# EAGLE board Keyboard_Scanner_LT_0p5 (EAGLE 9.5.0)
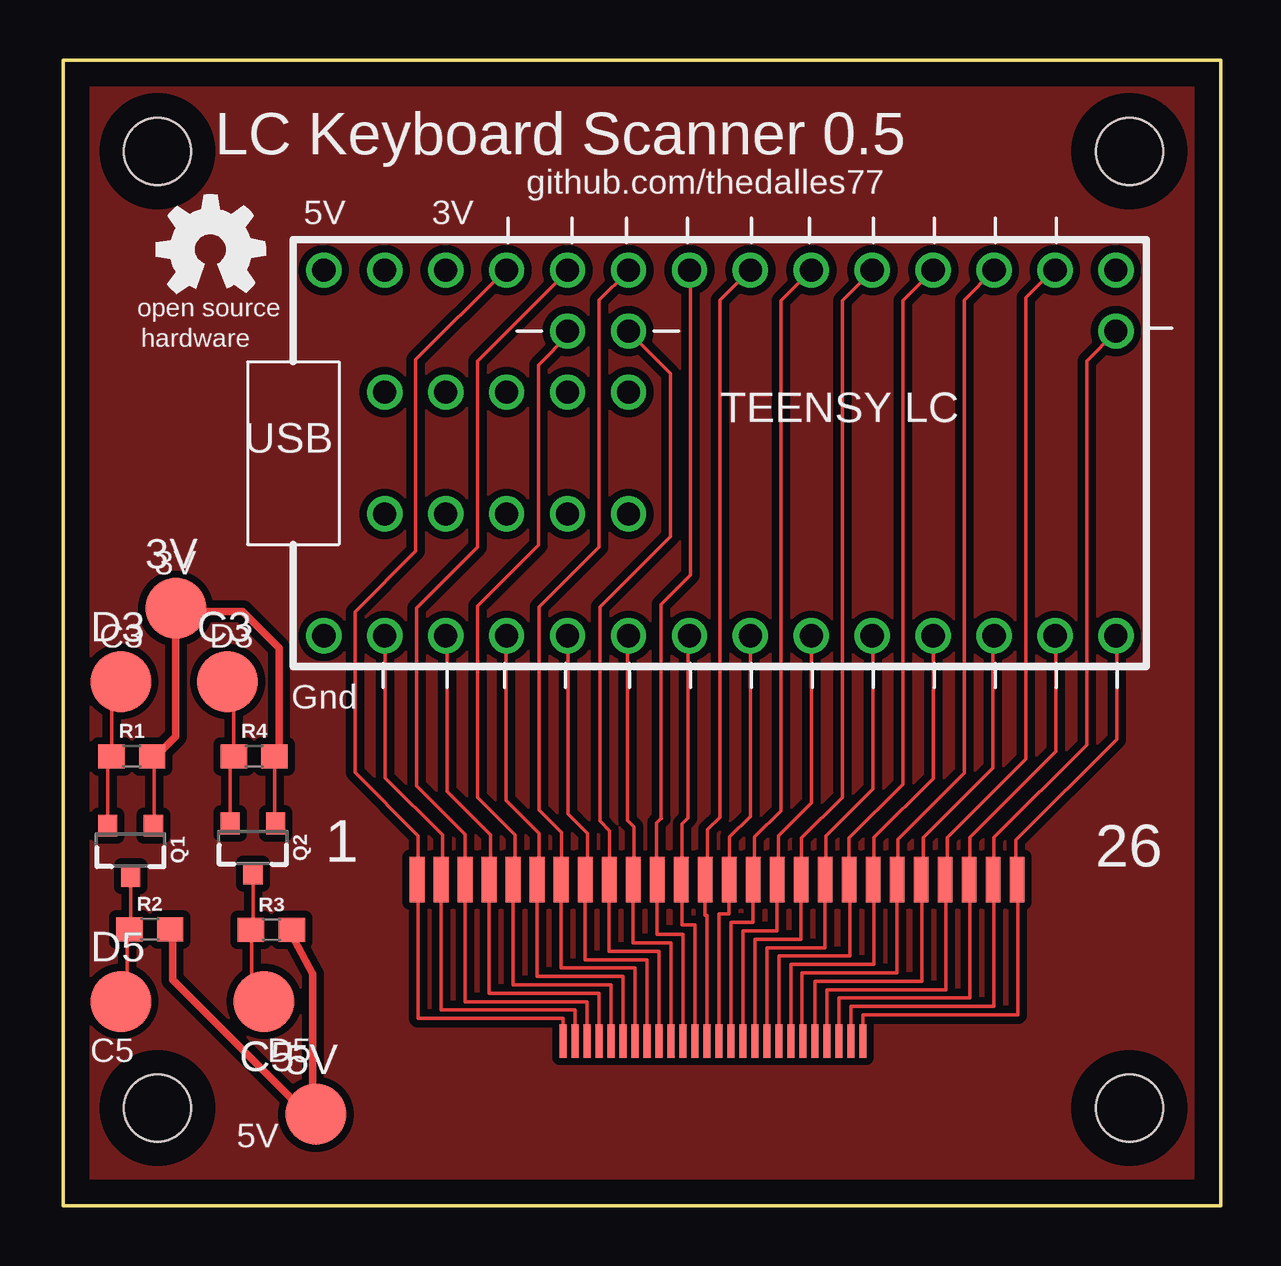
[diagram p0: board, top side]
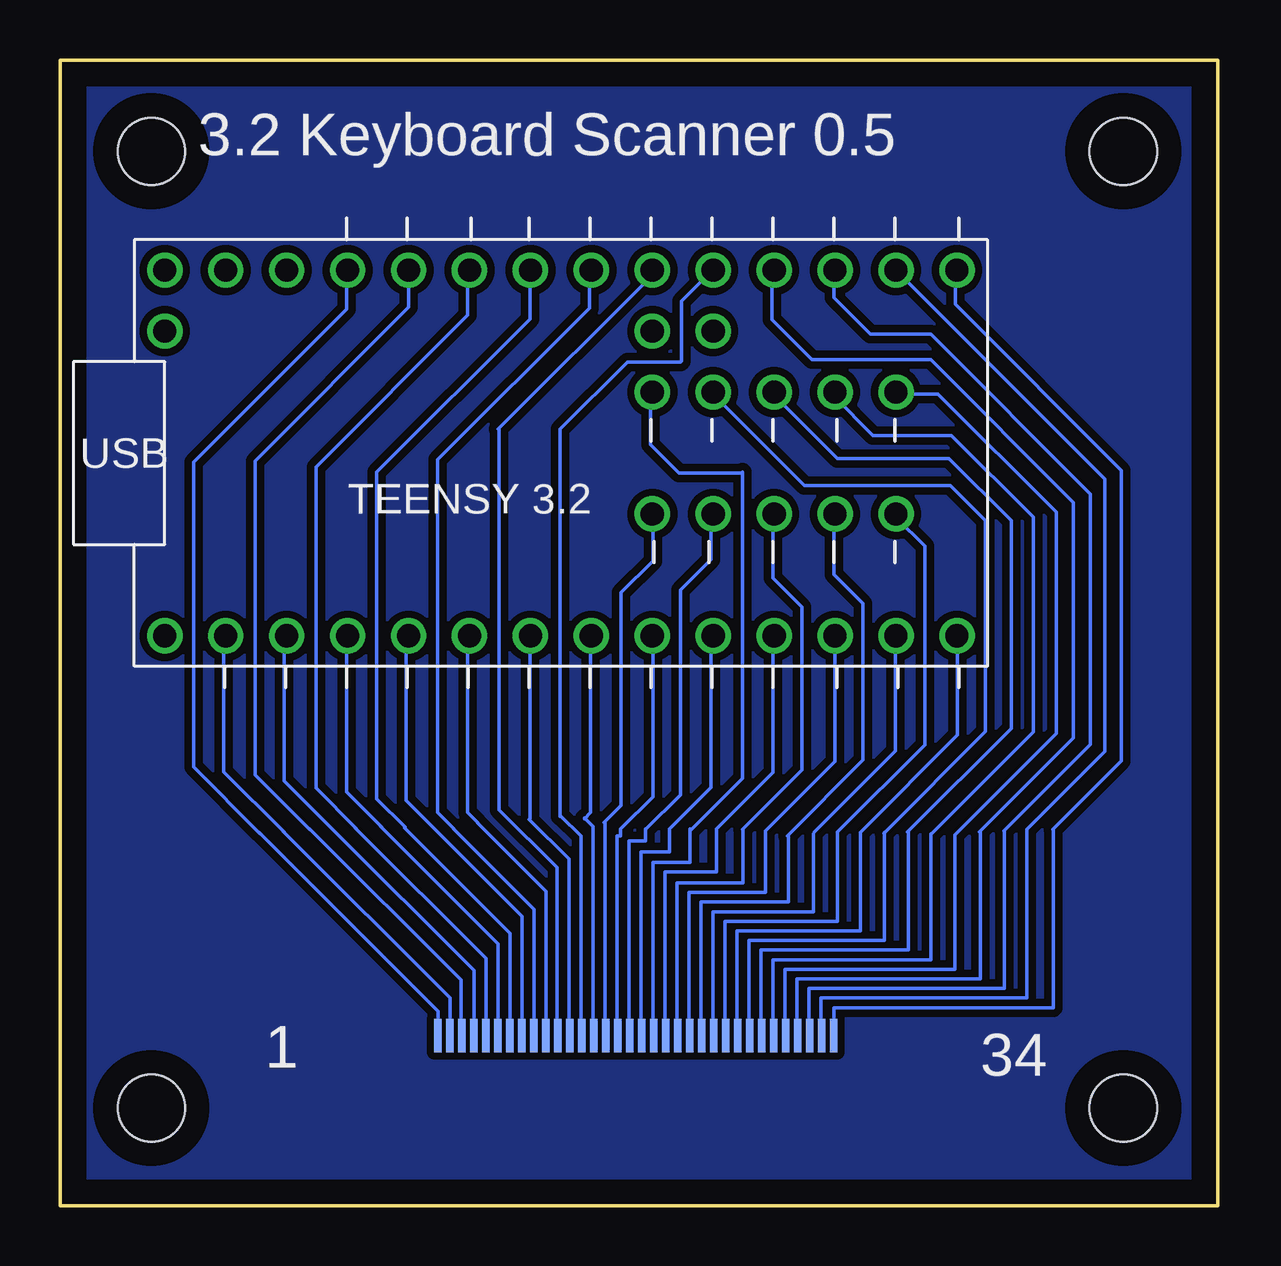
[diagram p1: board, bottom side, seen from below]

Size 48.26 x 47.75 mm. Coordinates in mm from the lower left corner, seen from the top.
Outline: 0,0 0,47.75 48.26,47.75 48.26,0 0,0
Copper layers (1*16): Top 0.035mm / dielectric 1.5mm / Bottom 0.035mm
Design rules "default": minimum track width 6mil, minimum drill 0.35mm, track to track 6mil, track to pad 6mil, pad to pad 6mil, via to via 6mil, smd to smd 6mil, copper to edge 40mil, drill to drill 6mil, minimum pad ring 10mil, minimum via ring 8mil, stop-mask expansion 4mil, vias tented up to drill 0mil, thermal gap 10mil
Holes 2.8 mm at 44.45,4.06 44.45,43.94 3.94,43.94 3.94,4.06

## Footprints (pad centres in the part's own frame; a part is rotated, then mirrored left to right if it is on the bottom)
B2,54 = smd 2.54 x 2.54: TP 0,0
TEENSY_COMBO = drill 0.965: 1 -11.43,7.62; 2 -13.97,7.62; 3 -16.51,7.62; 4 -6.35,5.08; 5 -3.81,5.08; 6 -3.81,2.54; 7 -6.35,2.54; 8 -8.89,2.54; 9 -11.43,2.54; 10 -13.97,2.54; 11 -13.97,-2.54; 12 -11.43,-2.54; 13 -8.89,-2.54; 14 -6.35,-2.54; 15 -3.81,-2.54; A -16.51,-7.62; B -13.97,-7.62; C -11.43,-7.62; D -8.89,-7.62; E -6.35,-7.62; F -3.81,-7.62; G -1.27,-7.62; H 1.27,-7.62; I 3.81,-7.62; J 6.35,-7.62; K 8.89,-7.62; L 11.43,-7.62; M 13.97,-7.62; N 16.51,-7.62; O 16.51,5.08; P 16.51,7.62; Q 13.97,7.62; R 11.43,7.62; S 8.89,7.62; T 6.35,7.62; U 3.81,7.62; V 1.27,7.62; W -1.27,7.62; X -3.81,7.62; Y -6.35,7.62; Z -8.89,7.62
FPC_DUAL = smd 0.61 x 1.905: 1 11.836,3.429; 2 10.836,3.429; 3 9.835,3.429; 4 8.834,3.429; 5 7.833,3.429; 6 6.833,3.429; 7 5.832,3.429; 8 4.831,3.429; 9 3.83,3.429; 10 2.83,3.429; 11 1.829,3.429; 12 0.828,3.429; 13 -0.173,3.429; 14 -1.173,3.429; 15 -2.174,3.429; 16 -3.175,3.429; 17 -4.176,3.429; 18 -5.177,3.429; 19 -6.177,3.429; 20 -7.178,3.429; 21 -8.179,3.429; 22 -9.18,3.429; 23 -10.18,3.429; 24 -11.181,3.429; 25 -12.182,3.429; 26 -13.183,3.429 | smd 0.3 x 1.4: P$1 5.4,-3.3; P$2 4.9,-3.3; P$3 4.4,-3.3; P$4 3.9,-3.3; P$5 3.4,-3.3; P$6 2.9,-3.3; P$7 2.4,-3.3; P$8 1.9,-3.3; P$9 1.4,-3.3; P$10 0.9,-3.3; P$11 0.4,-3.3; P$12 -0.1,-3.3; P$13 -0.6,-3.3; P$14 -1.1,-3.3; P$15 -1.6,-3.3; P$16 -2.1,-3.3; P$17 -2.6,-3.3; P$18 -3.1,-3.3; P$19 -3.6,-3.3; P$20 -4.1,-3.3; P$21 -4.6,-3.3; P$22 -5.1,-3.3; P$23 -5.6,-3.3; P$24 -6.1,-3.3; P$25 -6.6,-3.3; P$26 -7.1,-3.3
FPC_DUAL_FRONT = smd 0.3 x 1.4 bottom: P$1 8.76,0.39; P$2 8.26,0.39; P$3 7.76,0.39; P$4 7.26,0.39; P$5 6.76,0.39; P$6 6.26,0.39; P$7 5.76,0.39; P$8 5.26,0.39; P$9 4.76,0.39; P$10 4.26,0.39; P$11 3.76,0.39; P$12 3.26,0.39; P$13 2.76,0.39; P$14 2.26,0.39; P$15 1.76,0.39; P$16 1.26,0.39; P$17 0.76,0.39; P$18 0.26,0.39; P$19 -0.24,0.39; P$20 -0.74,0.39; P$21 -1.24,0.39; P$22 -1.74,0.39; P$23 -2.24,0.39; P$24 -2.74,0.39; P$25 -3.24,0.39; P$26 -3.74,0.39; P$27 -4.24,0.39; P$28 -4.74,0.39; P$29 -5.24,0.39; P$30 -5.74,0.39; P$31 -6.24,0.39; P$32 -6.74,0.39; P$33 -7.24,0.39; P$34 -7.74,0.39
SOT23-3 = smd 0.8 x 0.9: 1 -0.95,-1; 2 0.95,-1; 3 0,1.1
0603 = smd 1.1 x 1: 1 -0.85,0; 2 0.85,0

## Placement (x,y rotation side)
3V  [B2,54]  4.7,24.89 0 top  (not fitted)
5V  [B2,54]  10.54,3.81 0 top  (not fitted)
C3  [B2,54]  6.86,21.84 0 top  (not fitted)
C5  [B2,54]  8.38,8.51 180 top  (not fitted)
D3  [B2,54]  2.41,21.84 0 top  (not fitted)
D5  [B2,54]  2.41,8.51 0 top  (not fitted)
E$1  [TEENSY_COMBO]  27.38,31.37 0 top
E$2  [FPC_DUAL]  27.94,10.16 0 top
E$3  [FPC_DUAL_FRONT]  23.75,6.7 0 top
E$4  [OSHW_5MM]  6.15,39.85 0 top
Q1  220mA/50V/3.5Ω  [SOT23-3]  2.82,14.83 180 top
Q2  220mA/50V/3.5Ω  [SOT23-3]  7.92,14.93 180 top
R1  10k  [0603]  2.87,18.73 0 top
R2  10k  [0603]  3.62,11.52 0 top
R3  10k  [0603]  8.69,11.49 0 top
R4  10k  [0603]  7.97,18.73 0 top

## Library data of the parts
3V 5V C3 C5 D3 D5 = testpad
E$1 = Teensy_Combo
E$2 = FPC_Dual_front_0p5
E$3 = FPC_single_back_0p5
E$4 = oshw
Q1 Q2 = SparkFun-DiscreteSemi; PROD_ID: TRANS-00830
R1-R4 = SparkFun-Resistors; PROD_ID: RES-00824

## Nets
3V: R4.2
5V: R2.2
CLK: Q1.2 R1.1
DATA: Q2.2 R4.1
S$33: E$1.R
S$127: R3.2
TP_CLK: Q1.3 R2.1
TP_DATA: Q2.3 R3.1

## Tracks (layer width: path | path; a pad name or v marks a point on that pad's centre or on a via)
3V
  Top 0.152: 8.82,18.47 8.82,15.67
5V
  Top 0.813: 4.52,11.47 R2.2
CLK
  Top 0.152: Q1.2 1.87,18.63 2.03,18.98 2.03,20.7
CLK1
  Top 0.152: 2.67,9.2 2.67,11.56
CLK2
  Top 0.152: 7.86,8.82 7.86,11.18
DATA
  Top 0.152: Q2.2 6.97,18.63 R4.1 7.12,21.08
S$1
  Top 0.152: 39.8,12.7 39.8,7.95 33.35,7.95 33.35,7.45
S$2
  Top 0.152: 38.8,12.75 38.8,8.3 32.85,8.3 32.85,7.5
S$3
  Top 0.152: 37.8,12.7 37.8,8.65 32.35,8.65 32.35,7.45
S$4
  Top 0.152: 36.8,12.7 36.8,9 31.85,9 31.85,7.5
S$5
  Top 0.152: 35.8,12.7 35.8,9.35 31.35,9.35 31.35,7.5
S$6
  Top 0.152: 34.75,12.7 34.75,9.7 30.8,9.7 30.8,7.45
S$7
  Top 0.152: 33.8,12.7 33.8,10.05 30.35,10.05 30.35,7.5
S$8
  Top 0.152: 32.8,12.7 32.8,10.4 29.85,10.4 29.85,7.5
S$9
  Top 0.152: 31.75,12.7 31.75,10.75 29.35,10.75 29.35,7.5
S$10
  Top 0.152: 30.75,12.7 30.75,11.1 28.85,11.1 28.85,7.5
S$11
  Top 0.152: 29.75,12.7 29.75,11.45 28.35,11.45 28.35,7.45
S$12
  Top 0.152: 28.75,12.7 28.75,11.8 27.85,11.8 27.85,7.45
S$13
  Top 0.152: 27.75,12.7 27.75,12.15 27.35,12.15 27.35,7.45
S$14
  Top 0.152: 26.75,12.7 26.75,12.1 26.85,12.1 26.85,7.5
S$15
  Top 0.152: 20.85,7.5 20.85,7.8 14.8,7.8 14.8,12.75
S$16
  Top 0.152: 21.35,7.45 21.35,8.15 15.75,8.15 15.75,12.75
S$17
  Top 0.152: 16.75,12.75 16.75,8.5 21.85,8.5 21.85,7.45
S$18
  Top 0.152: 17.75,12.65 17.75,8.85 22.35,8.85 22.35,7.5
S$19
  Top 0.152: 18.75,12.7 18.75,9.2 22.85,9.2 22.85,7.5
S$20
  Top 0.152: 19.75,12.65 19.75,9.55 23.35,9.55 23.35,7.55
S$21
  Top 0.152: 20.75,12.7 20.75,9.9 23.85,9.9 23.85,7.5
S$22
  Top 0.152: 21.75,12.7 21.75,10.25 24.35,10.25 24.35,7.5
S$23
  Top 0.152: 22.75,12.7 22.75,10.6 24.85,10.6 24.85,7.55
S$24
  Top 0.152: 23.75,12.65 23.75,10.95 25.35,10.95 25.35,7.55
S$25
  Top 0.152: 24.75,12.65 24.75,11.3 25.85,11.3 25.85,7.55
S$26
  Top 0.152: 25.8,12.7 25.8,11.7 26.35,11.7 26.35,7.55
S$27
  Top 0.152: 43.92,23.7 43.92,19.43 39.73,15.24 39.73,14.3
S$28
  Top 0.152: 43.92,36.4 43.74,36.4
S$29
  Top 0.152: 43.89,36.42 42.67,35.2 42.67,19.2 38.81,15.34 38.81,14.25
S$30
  Top 0.152: 41.38,23.72 41.38,18.92 37.8,15.34 37.8,14.22 37.77,14.2
S$31
  Top 0.152: 41.33,38.91 41.2,38.91 40.13,37.85 40.13,18.62 36.85,15.34 36.85,14.45 36.8,14.4
S$32
  Top 0.152: 38.76,23.72 38.76,18.24 35.87,15.34 35.87,14.3
S$33
  Top 0.152: E$1.R 37.57,37.74 37.57,18.03 34.8,15.27 34.8,14.35 34.75,14.3
S$34
  Top 0.152: 36.27,23.72 36.27,17.8 33.81,15.34 33.81,14.4
S$35
  Top 0.152: 36.22,38.91 36.2,38.91 35,37.72 35,17.55 32.77,15.32 32.77,14.3
S$36
  Top 0.152: 33.76,23.72 33.76,17.37 31.8,15.42 31.8,14.2
S$37
  Top 0.152: 33.73,38.91 33.66,38.91
S$38
  Top 0.152: 31.85,14.3 31.8,14.25
S$39
  Top 0.152: 33.73,38.94 33.71,38.94 32.49,37.72 32.49,17.02 30.79,15.32 30.79,14.2
S$40
  Top 0.152: 31.19,23.65 31.19,16.79 29.82,15.42 29.82,14.28 29.79,14.25
S$41
  Top 0.152: 31.11,38.94 31.11,38.91 29.92,37.72 29.92,16.46 28.83,15.37 28.83,14.3
S$42
  Top 0.152: 28.65,23.67 28.65,16.23 27.79,15.37 27.79,14.3 27.76,14.28
S$43
  Top 0.152: 28.65,39.01 27.38,37.74 27.38,16.18 26.87,15.67 26.87,14.25
S$44
  Top 0.152: 26.06,23.67 26.06,16.15 25.81,15.9 25.81,14.22 25.88,14.15
S$45
  Top 0.152: 26.16,38.91 26.16,26.29 24.92,25.04 24.92,16.15 24.94,16.13 24.92,16.13 24.74,15.95 24.74,14.28 24.71,14.25
S$46
  Top 0.152: 23.52,23.72 23.52,16.05 23.8,15.77 23.8,14.25 23.75,14.2
S$47
  Top 0.152: 23.65,36.45 23.65,36.35 25.32,34.67 25.32,27.89 22.38,24.94 22.38,16.03 22.78,15.62 22.78,14.15 22.84,14.1
S$48
  Top 0.152: 21.06,23.72 21.06,16.33 21.87,15.52 21.87,14.38 21.84,14.35
S$49
  Top 0.152: 23.57,38.91 23.52,38.91 22.35,37.74 22.35,27.46 19.84,24.94 19.84,16.48 20.78,15.54 20.78,14.28
S$50
  Top 0.152: 18.47,23.65 18.47,16.89 19.84,15.52 19.84,14.28 19.81,14.25
S$51
  Top 0.152: 21.08,36.37 21.08,36.3 19.81,35.03 19.81,27.53 17.27,24.99 17.27,17.02 18.85,15.44 18.85,14.22 18.8,14.17
S$52
  Top 0.152: 16,23.75 16,17.27 17.83,15.44 17.83,14.28
S$53
  Top 0.152: 21.06,38.94 21.01,38.94 17.27,35.2 17.27,27.46 14.73,24.92 14.73,17.5 16.76,15.47 16.76,14.38 16.74,14.35
S$54
  Top 0.152: 13.44,23.77 13.44,17.83 15.82,15.44 15.82,14.3 15.8,14.28
S$55
  Top 0.152: 18.44,38.91 18.36,38.91 14.71,35.26 14.71,27.28 12.17,24.74 12.17,18.06 14.81,15.42 14.81,14.3 14.78,14.28
S$56
  Bottom 0.152: 29.95,32.35 29.95,16.5 27.55,14.1 27.55,7.65
S$57
  Bottom 0.152: 16,7.7 16,8.25 6.85,8.25 6.85,15.7
S$58
  Bottom 0.152: 16.55,7.65 16.55,8.65 7.95,8.65 7.95,15.65
S$59
  Bottom 0.152: 17.05,7.7 17.05,9.05 8.9,9.05 8.9,15.6
S$60
  Bottom 0.152: 17.55,7.7 17.55,9.45 9.9,9.45 9.9,15.55
S$61
  Bottom 0.152: 18.05,7.7 18.05,9.85 10.95,9.85 10.95,15.45
S$62
  Bottom 0.152: 18.55,7.7 18.55,10.25 11.95,10.25 11.95,15.5
S$63
  Bottom 0.152: 19.05,7.7 19.05,10.65 12.9,10.65 12.9,15.6
S$64
  Bottom 0.152: 19.55,7.7 19.55,11.05 13.9,11.05 13.9,15.55
S$65
  Bottom 0.152: 20.05,7.65 20.05,11.45 14.9,11.45 14.9,15.55
S$66
  Bottom 0.152: 20.55,7.65 20.55,11.85 15.85,11.85 15.85,15.55
S$67
  Bottom 0.152: 21.05,7.7 21.05,12.25 16.85,12.25 16.85,15.5
S$68
  Bottom 0.152: 21.55,7.7 21.55,12.65 17.9,12.65 17.9,15.4
S$69
  Bottom 0.152: 22.05,7.7 22.05,13.05 18.85,13.05 18.85,15.6
S$70
  Bottom 0.152: 22.55,7.7 22.55,13.45 19.8,13.45 19.8,15.65
S$71
  Bottom 0.152: 23.05,7.7 23.05,13.9 20.9,13.9 20.9,15.7
S$72
  Bottom 0.152: 23.55,7.7 23.55,14.3 22,14.3 22,15.7
S$73
  Bottom 0.152: 24.05,7.7 24.05,14.75 22.85,14.75 22.85,15.7
S$74
  Bottom 0.152: 24.55,7.7 24.55,15.2 23.85,15.2 23.85,15.65 23.85,15.7
S$75
  Bottom 0.152: 25.05,7.65 25.05,15.4 24.9,15.4 24.9,15.7
S$76
  Bottom 0.152: 25.55,7.65 25.55,15.95
S$77
  Bottom 0.152: 26.05,7.7 26.05,15.8 26.4,16.15
S$78
  Bottom 0.152: 36.95,15.75 31,9.8 31,7.7
S$79
  Bottom 0.152: 39.95,15.55 32.5,8.1 32.5,7.7
S$80
  Bottom 0.152: 38.95,15.6 32,8.65 32,7.65
S$81
  Bottom 0.152: 37.85,15.7 31.55,9.4 31.55,7.7
S$82
  Bottom 0.152: 35.95,15.75 30.5,10.3 30.5,7.65
S$83
  Bottom 0.152: 34.9,15.8 30,10.9 30,7.65
S$84
  Bottom 0.152: 33.9,15.75 29.5,11.35 29.5,7.7
S$85
  Bottom 0.152: 32.9,15.95 29,12.05 29,7.65
S$86
  Bottom 0.152: 31.85,15.7 28.5,12.35 28.5,7.65 28.5,7.6
S$87
  Bottom 0.152: 30.85,15.95 28,13.1 28,7.6
S$88
  Bottom 0.152: 27.4,16.25 26.55,15.4 26.55,7.7 26.6,7.65
S$89
  Bottom 0.152: 27.05,7.7 27.05,14.45 28.7,16.1
S$90
  Bottom 0.152: 36.32,38.91 36.32,37.36 42.7,30.99 42.7,18.29 39.93,15.52
S$91
  Bottom 0.152: 41.43,23.7 41.43,18.09 38.91,15.57
S$92
  Bottom 0.152: 33.73,38.91 33.73,37.44 40.13,31.04 40.13,17.96 37.85,15.67
S$93
  Bottom 0.152: 38.91,23.7 38.91,17.7 36.93,15.72
S$94
  Bottom 0.152: 31.27,38.96 31.27,37.11 37.59,30.79 37.59,17.4 35.92,15.72
S$95
  Bottom 0.152: 36.32,23.85 36.32,17.25 34.85,15.77
S$96
  Bottom 0.152: 28.68,38.91 28.68,36.96 35.05,30.58 35.05,16.94 33.88,15.77
S$97
  Bottom 0.152: 33.83,23.7 33.83,16.89 32.92,15.98
S$98
  Bottom 0.152: 26.19,38.91 26.19,37.41 32.51,31.09 32.51,16.38 31.85,15.72
S$99
  Bottom 0.152: 31.27,23.7 31.27,16.38 30.86,15.98
S$100
  Bottom 0.152: 23.65,38.96 23.65,38.71 30,32.36
S$101
  Bottom 0.152: 28.68,23.65 28.68,16.13
S$102
  Bottom 0.152: 21.03,38.96 21.08,38.96 22.35,37.69 22.35,35.2 22.4,35.15 24.61,35.15 27.41,32.36 27.41,16.23
S$103
  Bottom 0.152: 26.14,23.65 26.14,16.38 26.4,16.12
S$104
  Bottom 0.152: 23.55,28.75 23.55,26.87 24.87,25.55 24.87,16.69 25.58,15.97
S$105
  Bottom 0.152: 23.55,23.65 23.55,17.04 24.87,15.72
S$106
  Bottom 0.152: 21.13,28.75 21.13,26.92 22.4,25.65 22.4,17.12 23.85,15.67
S$107
  Bottom 0.152: 21.13,23.65 21.13,17.42 22.84,15.72
S$108
  Bottom 0.152: 23.65,33.83 23.65,31.73 22.45,30.53 19.86,30.53 19.81,30.58 19.81,17.8 21.95,15.67
S$109
  Bottom 0.152: 18.54,23.7 18.54,18.06 20.88,15.72
S$110
  Bottom 0.152: 18.54,28.75 18.54,26.16 17.32,24.94 17.32,18.16 19.81,15.67
S$111
  Bottom 0.152: 15.95,23.65 15.95,18.52 18.85,15.62
S$112
  Bottom 0.152: 16,28.8 16,26.31 14.78,25.09 14.78,18.57 17.93,15.42
S$113
  Bottom 0.152: 13.44,23.65 13.44,18.95 16.82,15.57
S$114
  Bottom 0.152: 13.44,28.65 13.39,28.65 12.22,27.48 12.22,19.2 15.85,15.57
S$115
  Bottom 0.152: 10.85,23.65 10.85,19.61 14.88,15.57
S$116
  Bottom 0.152: 21.08,33.83 21.03,33.83 17.22,30.02 11.15,30.02 9.68,28.55 9.68,19.76 13.92,15.52
S$117
  Bottom 0.152: 18.54,33.83 15.85,31.14 11.2,31.14 8.61,28.55 8.61,19.89 12.93,15.57
S$118
  Bottom 0.152: 16,33.83 16,33.73 14.38,32.11 11.1,32.11 7.7,28.7 7.7,19.74 11.91,15.52
S$119
  Bottom 0.152: 13.34,33.83 11.66,33.83 6.73,28.91 6.73,19.68 10.95,15.47
S$120
  Bottom 0.152: 18.59,38.96 18.59,36.93 16.92,35.26 11.96,35.26 6.02,29.31 6.02,19.48 9.93,15.57
S$121
  Bottom 0.152: 16,38.91 16,37.85 14.48,36.32 11.96,36.32 5.31,29.67 5.31,19.23 8.91,15.62
S$122
  Bottom 0.152: 13.44,38.96 13.39,38.96 4.7,30.28 4.7,18.92 7.95,15.67
S$123
  Bottom 0.152: 10.95,38.96 10.95,37.57 4.01,30.63 4.01,18.54 6.88,15.67
S$124
  pour Top (isolate 0.305): 0,0 0,47.75 48.26,47.75 48.26,0
S$125
  pour Bottom (isolate 0.305): 0,0 0,47.75 48.26,47.75 48.26,0
S$127
  Top 0.152: 9.4,11.49 R3.2
S$128
  Top 0.305: 9.65,11.05 10.41,9.65 10.41,4.83
S$129
  Top 0.305: 9.65,4.32 4.57,9.4 4.57,11.18
S$130
  Top 0.305: 9.02,19.05 9.02,23.24 7.49,24.77 5.59,24.77
S$131
  Top 0.305: 4.7,23.88 4.7,19.56 4.06,18.92
S$133
  Top 0.152: 3.81,16.13 3.81,18.41
TP_CLK
  Top 0.152: Q1.3 2.82,11.85 2.89,11.77
TP_DATA
  Top 0.152: Q2.3 7.92,11.79 7.97,11.74

## Text on the board
tPlace: LC Keyboard Scanner 0.5 | github.com/thedalles77 | 5V | 3V | 3V | C3 | D3 | Gnd | 1 | 26 | C5 | D5 | 5V
bPlace: 3.2 Keyboard Scanner 0.5 | 1 | 34